# Altium PCB dc_cdi.PcbDoc (part 2 of 3)
Units mm, origin at the board's own origin, x right, y up, seen from the top; angles counter-clockwise.
Board outline 67 x 85 mm, 4 copper layers (Signal Top, Gnd, Power, Signal Bottom), stack 0.603 mm thick; 104 components, 72 nets, 386 pads, 139 vias.
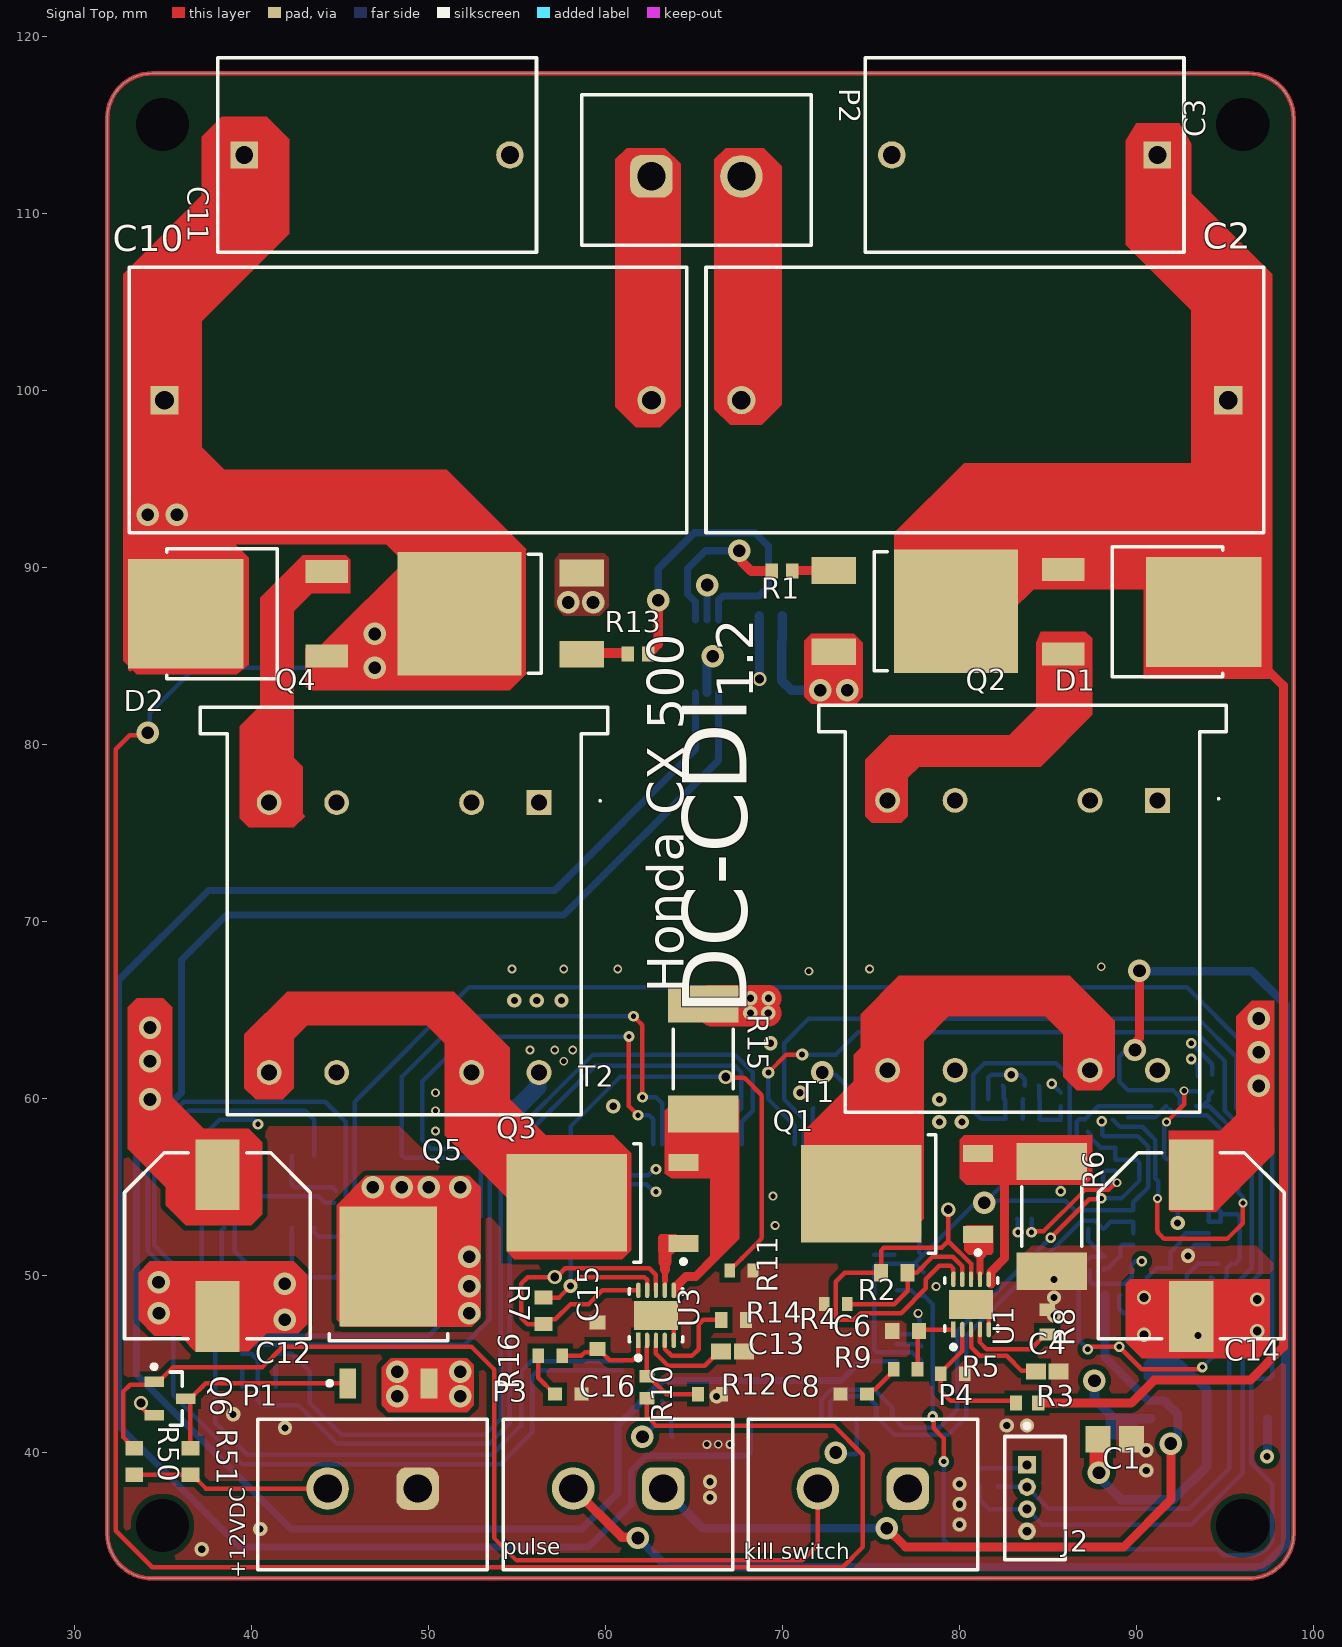
[diagram p0: Signal Top view]

## Via types
v1: diameter 1.27, hole 0.711, Signal Top to Signal Bottom, 45 vias
v2: diameter 0.8, hole 0.4, Signal Top to Signal Bottom, 36 vias
v3: diameter 0.5, hole 0.3, Signal Top to Signal Bottom, 25 vias
v4: diameter 0.6, hole 0.3, Signal Top to Signal Bottom, 22 vias
v5: diameter 0.8, hole 0.5, Signal Top to Signal Bottom, 9 vias
v6: diameter 0.7, hole 0.35, Signal Top to Signal Bottom, 2 vias

## Nets (pads, with @x,y where several pads share a name; then routed paths per layer and width w, separated by ;. In a path a pad name is that pad's centre, name@x,y a point inside that pad or via, vN(x,y) a via of type N, cw(c..) or ccw(c..) an arc to the next point about the centre after c; other vN are vias at no path point) (continued)
+3V3: (continued)
  Signal Bottom w0.254: J1.3@37.211,56.775 37.211,57.8 38.212,58.801 40.132,58.801 v4(40.386,58.547) ; C36.1@60.598,56.388 60.598,55.68 U8.75@60.621,55.657 ; U8.75@60.957,55.657 62.421,55.657 62.771,56.007 v4(62.865,56.007) ; v1(62.103,40.894) 62.144,40.894 62.707,41.457 U8.50@62.707,41.907 ; v1(72.263,61.468) 72.39,61.341 73.025,61.341 74.707,59.659 U8.100@74.707,57.407 ; v1(73.025,40.005) 73.133,39.897 C35.1@74.168,39.897 74.207,39.936 U8.27@74.207,41.907 ; R35.1@77.724,52.153 77.724,51.308 77.915,51.117 ; R36.1@77.851,45.168 77.851,45.193 77.703,45.341 77.636,45.341 77.32,45.657 U8.21@76.457,45.657 75.333,45.657 75.184,45.806 75.184,50.508 75.333,50.657 U8.11@76.457,50.657 77.454,50.657 ; C37.1@77.978,50.184 77.505,50.657 77.454,50.657 ; R39.2@81.153,39.108 R38.2@82.169,39.108 83.618,39.108 J2.1@83.82,39.31 ; U9.5@82.616,56.458 82.616,55.311 v1@81.534,54.229 ; v4(85.217,60.833) 85.23,60.833 85.725,60.338 R30.1@85.725,60.313 ; v4(88.046,58.707) 88.078,58.675 88.078,57.962 88.168,57.871 U5.8@88.807,57.871 90.084,57.871 90.678,57.277 90.678,54.991 89.824,54.137 89.824,53.771 U4.8@89.734,53.68 ; C32.1@88.773,41.059 88.804,41.09 89.631,41.09 C31.1@89.662,41.122 ; U4.8@89.823,53.68 U4.8@89.734,53.68 ; U7.4@97.392,41.9 U7.4@97.402,41.91 ; 77.454,50.657 77.915,51.117 ; 77.915,51.117 80.899,54.102 v1(81.407,54.102) v1@81.534,54.229 ; v1@81.534,54.229 85.979,54.229 86.528,53.68 U4.8@89.734,53.68
  Signal Bottom w0.5: v2@97.392,39.787 U7.4@97.392,41.9
  Signal Bottom w0.54: v1(87.63,44.069) 87.63,43.053 88.773,41.91 U7.2@90.812,41.91